# EAGLE board sp6641 (EAGLE 6.2)
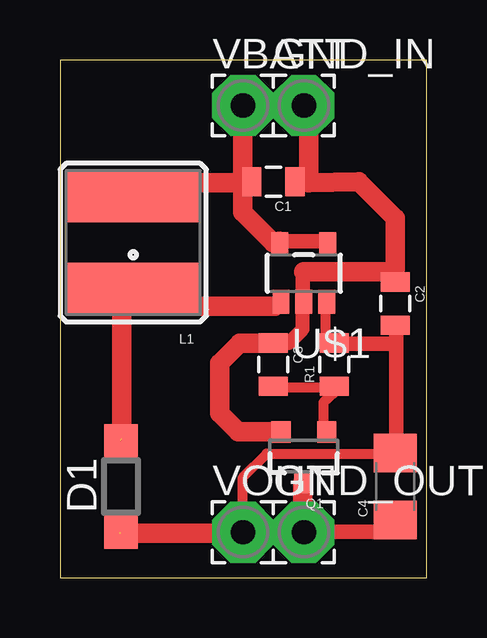
[diagram p0: board, top side]

Size 15.29 x 21.58 mm. Coordinates in mm from the lower left corner, seen from the top.
Outline: 0,0 15.29,0 15.29,21.58 0,21.58 0,0
Copper layers (1*16): Top 0.035mm / dielectric 1.5mm / Bottom 0.035mm
Design rules: minimum track width 16mil, minimum drill 16mil, track to track 8mil, track to pad 8mil, pad to pad 8mil, via to via 8mil, smd to smd 8mil, copper to edge 4mil, drill to drill 16mil, minimum pad ring 10mil, minimum via ring 8mil, stop-mask expansion 4mil, vias tented up to drill 0mil, thermal gap 10mil

## Footprints (pad centres in the part's own frame; a part is rotated, then mirrored left to right if it is on the bottom)
0805 = smd 0.8 x 1.2: 1 -0.9,0; 2 0.9,0
1206 = smd 1.6 x 1.8: 1 -1.4,0; 2 1.4,0
SOD123 = smd 1.4 x 1.4: A 1.9,0; C -1.9,0
2,54/1,0 = drill 1.016 pad 2.54 octagon: 1 0,0
CR54 = smd 5.5 x 2.15: P$1 0,1.92; P$2 0,-1.92
SOT23-3 = smd 0.8 x 0.9: 1 -0.95,-1; 2 0.95,-1; 3 0,1.1
SOT23-5 = smd 0.7 x 1: 1 0.95,1.2; 2 0,1.2; 3 -0.95,1.2; 4 -1,-1.2; 5 1,-1.2

## Placement (x,y rotation side)
C1  22uF  [0805]  8.89,16.51 180 top
C2  22uF  [0805]  13.97,11.43 270 top
C3  10nF  [0805]  8.89,8.89 270 top
C4  1uF  [1206]  13.97,3.81 90 top
D1  MBR0520  [SOD123]  2.54,3.81 90 top
GND_IN  [2,54/1,0]  10.16,19.68 0 top
GND_OUT  [2,54/1,0]  10.16,1.91 0 top
L1  22uH  [CR54]  3.05,13.97 180 top
Q1  [SOT23-3]  10.16,5.08 180 top
R1  2M  [0805]  11.43,8.89 90 top
U$1  SP6641A  [SOT23-5]  10.16,12.7 180 top
VBATT  [2,54/1,0]  7.62,19.68 0 top
VOUT  [2,54/1,0]  7.62,1.91 0 top

## Library data of the parts
C1-C4 L1 Q1 R1 = SparkFun
D1 = diode
GND_IN GND_OUT VBATT VOUT = wirepad
U$1 = Sipex Custom

## Nets
GND: C1.1 C2.1 C3.1 GND_IN.1 Q1.2 U$1.2
GND_OUT: C4.1 GND_OUT.1 Q1.3
N$2: C3.2 Q1.1 R1.1
N$3: D1.A L1.P$1 U$1.1
VBATT: C1.2 L1.P$2 U$1.4 U$1.5 VBATT.1
VOUT: C2.2 C4.2 D1.C R1.2 U$1.3 VOUT.1

## Tracks (layer width: path | path; a pad name or v marks a point on that pad's centre or on a via)
GND
  Top 0.406: C3.1 8.51,9.78 8.53,9.8 8.76,9.78 | 9.14,6.1 Q1.2 | 8.89,9.75 C3.1 | C3.1 9.53,9.78 | 10.11,11.28 U$1.2 10.11,11.58 | C3.1 | 10.36,16.76 C1.1 10.36,16.46 | 10.36,19.51 GND_IN.1 | 13.97,12.85 13.72,12.75 13.72,12.72 C2.1 | 10.16,12.75 10.11,12.7
  Top 0.584: 10.11,11.28 10.11,10.36 9.53,9.78
  Top 0.61: 10.11,12.7 10.11,11.58
  Top 0.813: 9.14,6.1 7.42,6.1 6.66,6.86 6.66,8.94 7.49,9.78 8.76,9.78 | 10.36,19.51 10.36,16.76 | 10.36,16.46 12.45,16.51 13.97,14.99 13.97,12.85 | 13.72,12.75 10.16,12.75
GND_OUT
  Top 0.406: 10.11,3.96 Q1.3 | 13.72,1.93 C4.1 | 10.36,2.13 10.11,1.93 GND_OUT.1 10.36,2.13
  Top 0.61: 10.11,1.93 13.72,1.93
  Top 0.813: 10.11,1.93 10.11,3.96
N$2
  Top 0.406: Q1.1 10.97,6.1 10.97,7.32 11.63,7.92 R1.1 11.33,7.92 8.89,7.92 C3.2
N$3  (1 unrouted)
  Top 0.406: 8.94,11.33 U$1.1 | 2.49,11.33 L1.P$1 2.56,11.66
  Top 0.813: 2.49,11.33 8.94,11.33 | 2.56,11.66 2.56,5.79
VBATT
  Top 0.406: 9.2,14.02 U$1.5 9.14,14.02 | 11.02,14.02 U$1.4 | 7.62,16.46 C1.2 | 7.62,16.76 C1.2 | 2.74,16.46 L1.P$2 | 7.32,16.46 C1.2
  Top 0.61: 11.02,14.02 9.2,14.02
  Top 0.813: 7.62,16.46 7.87,16.26 7.62,16.51 7.62,15.24 8.89,13.97 9.14,13.97 9.14,14.02 | VBATT.1 7.62,16.76 | 7.32,16.46 2.74,16.46
VOUT  (1 unrouted)
  Top 0.406: U$1.3 11.07,11.28 11.07,10.06 R1.2 11.63,9.75 | 13.82,9.75 13.97,9.73 C2.2 14.02,10.44 | 14.02,5.49 C4.2 13.72,5.18 8.61,5.18 7.62,4.19 7.62,2.54 6.76,1.85 | 6.76,1.85 7.62,2.13 VOUT.1 6.76,1.85
  Top 0.61: 13.82,9.75 11.63,9.75 | 14.02,10.44 14.02,5.49
  Top 0.813: 6.76,1.85 2.49,1.85